# Altium PCB ADSTM32-PCB.PcbDoc
Units mm, origin at the board's own origin, x right, y up, seen from the top; angles counter-clockwise.
Board outline 45 x 31.75 mm, 2 copper layers (Top Layer, Bottom Layer), stack 1.671 mm thick; 30 components, 26 nets, 133 pads, 27 vias.
Unrouted connection lines stored in the file: 30.
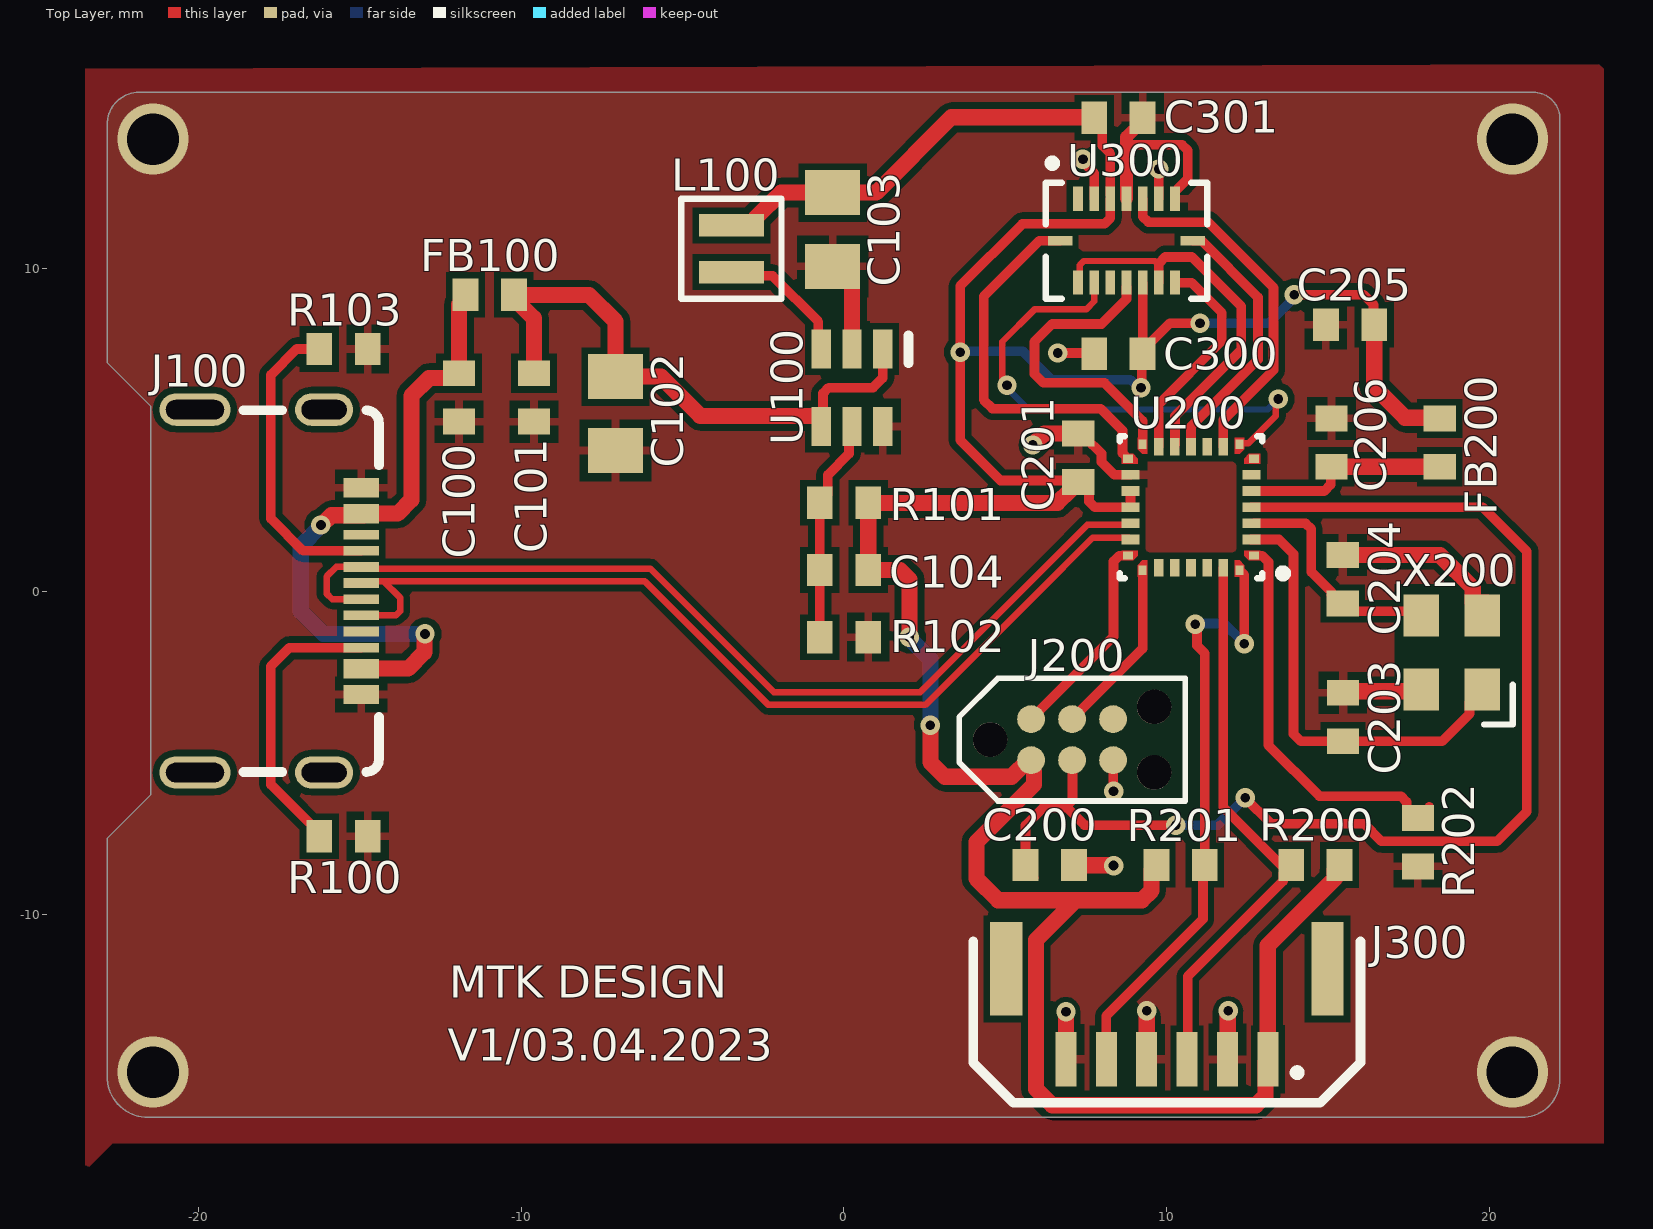
[diagram p0: Top Layer view]
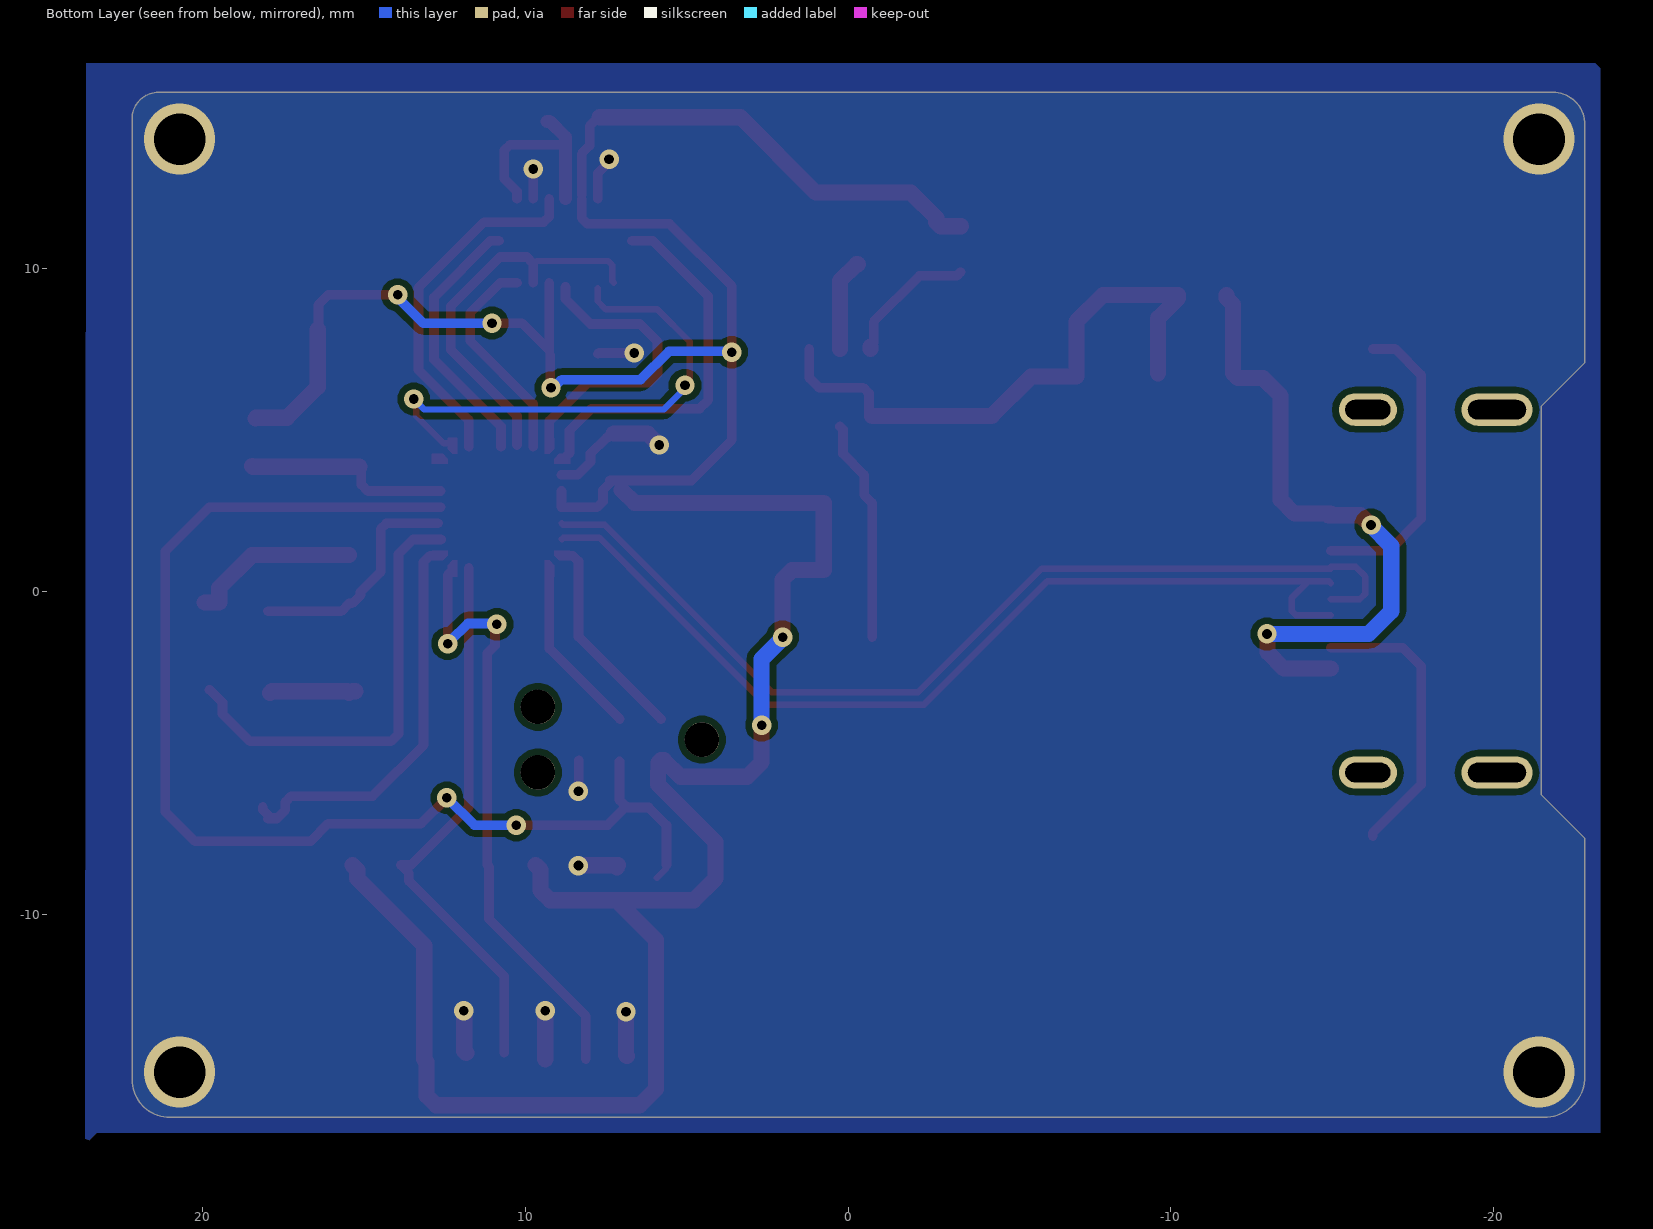
[diagram p1: Bottom Layer view, seen from below]
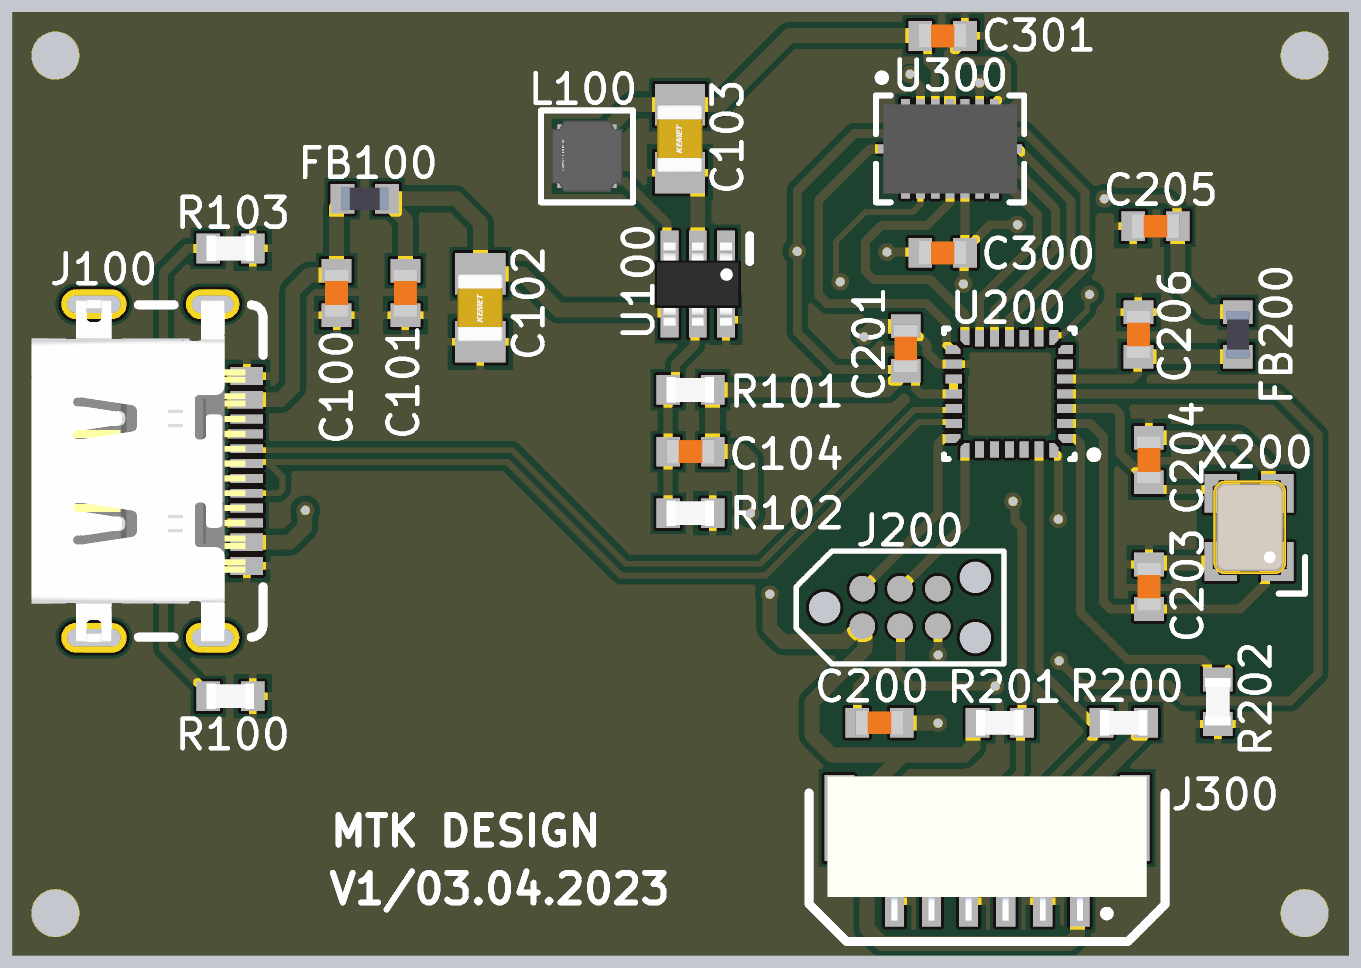
[diagram p2: 3D render of the assembled board from above, using the file's embedded part models]

## Layer stack, top to bottom
Top Solder: solder mask 0.0102, Solder Resist, Dk 3.5
Top Layer: signal copper 0.0356
Dielectric 1: dielectric 1.6, FR-4, Dk 4.6
Bottom Layer: signal copper 0.0356
Bottom Solder: solder mask 0.0102, Solder Resist, Dk 3.5

## Board outline
-21.555,-16.3 cw(c-21.555,-15.03) -22.825,-15.03 -22.825,-7.66 -21.475,-6.31 -21.475,5.73 -22.825,7.08 -22.825,14.45 cw(c-21.825,14.45) -21.825,15.45 19.525,15.45 19.5,15.45 21.35,15.45 cw(c21.35,14.625) 22.175,14.625 22.175,14.575 22.175,-15.105 22.175,-15.125 cw(c21,-15.125) 21,-16.3 19.075,-16.3 19.055,-16.3

## Design rules (kind name [scope] priority, off if disabled: settings)
Clearance [All] p1: gap=0.2 ignorepadtopadclearanceinfootprint=FALSE except(0: Arc-Hole Track-Hole SMDPad-Hole THPad-Hole Via-Hole Fill-Hole Poly-Hole Region-Hole Text-Hole; 0.15: Arc-Arc Arc-Track Arc-SMDPad Track-Track Track-SMDPad SMDPad-SMDPad; 0.3: Arc-THPad Track-THPad SMDPad-THPad THPad-THPad)
DiffPairsRouting [All] p1: maxlimit=0.3 minlimit=0.2 mostfreqgap=0.2 toplayer_minwidth=0.15 toplayer_maxwidth=1 toplayer_prefwidth=0.3 bottomlayer_minwidth=0.15 bottomlayer_maxwidth=1 bottomlayer_prefwidth=0.3 maxuncoupledlength=12.7
PolygonConnect [All] p1: thpad.connectstyle=Relief thpad.reliefconductorwidth=0.254 thpad.reliefentries=4 thpad.polygonreliefangle="90 Angle" thpad.airgapwidth=0.254 smdpad.connectstyle=Relief smdpad.reliefconductorwidth=0.254 smdpad.reliefentries=4 smdpad.polygonreliefangle="90 Angle" smdpad.airgapwidth=0.254 via.connectstyle=Direct via.reliefconductorwidth=0.254 via.reliefentries=4 via.polygonreliefangle="90 Angle" via.airgapwidth=0.254
RoutingVias [All] p1: holewidth=0.3 width=0.7 viastyle="Through Hole" minholewidth=0.25 minwidth=0.6 maxholewidth=0.3 maxwidth=0.7
SilkToSilkClearance [All] p1: silktosilkclearance=0.2
SolderMaskExpansion [All] p1: expansion=0.102 istentingtop=FALSE
UnRoutedNet [All] p1: checkbadconnections=TRUE
Width [All] p1: maxlimit=1 minlimit=0.15 preferedwidth=0.3
27 further rules are at their usual default settings.

## Classes and differential pairs
differential pair class USB: USB_D
differential pair USB_D: +USB_D_P -USB_D_N

## Components (designator, comment, footprint, x,y, rotation, side; value= is the part's Value field where it differs from the comment)
C100 "100n" CAP_0603 -11.925,6 r90 top
C101 "100n" CAP_0603 -9.603,6 r90 top
C102 "4u7" CAP_0805 -7.075,5.5 r90 top
C103 "4u7" CAP_0805 -0.35,11.201 r90 top
C104 "22p" CAP_0603 0,0.654 r0 top
C200 "100n" CAP_0603 6.372,-8.483 r180 top
C201 "100n" CAP_0603 7.256,4.13 r270 top
C203 "10p" CAP_0603 15.455,-3.9 r270 top
C204 "10p" CAP_0603 15.45,0.37 r270 top
C205 "100n" CAP_0603 15.675,8.249 r0 top
C206 "100n" CAP_0603 15.1,4.6 r270 top
C300 "100n" CAP_0603 8.5,7.35 r0 top
C301 "100n" CAP_0603 8.5,14.662 r180 top
FB100 "120R" FB_0603 -10.975,9.175 r0 top
FB200 "120R" FB_0603 18.45,4.6 r270 top
J100 "USB4510-03-1-A" USB4510-03-1-A -18.1,0 r270 top
J200 "TC2030-NL" TC2030-NL-FP 7.065,-4.6 r0 top
J300 "SM06B-GHS-TB" SM06B-GHS-TB 10,-13.1 r180 top
L100 "10u" FP-NRH2412-MFG -3.485,10.605 r90 top
R100 "5k1" RES_0603 -15.5,-7.592 r180 top
R101 "887k" RES_0603 0,2.734 r0 top
R102 "280k" RES_0603 0,-1.425 r180 top
R103 "5k1" RES_0603 -15.5,7.5 r180 top
R200 "5k1" RES_0603 14.6,-8.483 r0 top
R201 "5k1" RES_0603 10.425,-8.483 r180 top
R202 "5k1" RES_0603 17.775,-7.775 r90 top
U100 "LTC3405ES6#TRMPBF" SOT-23-6 0.25,6.3 r180 top
U200 "STM32F042G6U6" STM-UFQFPN28_V 10.748,2.6 r180 top
U300 "BMI088" BMI088 8.75,10.855 r0 top
X200 "24MHz" XTAL_3225 18.825,-1.9 r90 top

## Footprints (in the part's own frame and the unit in brackets; to place one, negate y for a bottom-side part, rotate by r counter-clockwise, add the part's x,y. Pads: shape width x height; smd on the part's side, far side on the other; paste and mask are expansions set on the pad)
BMI088 [mm]
  rect 0.3x0.75 smd: 1(-1.5,1.3) 2(-1,1.3) 3(-0.5,1.3) 4(0,1.3) 5(0.5,1.3) 6(1,1.3) 7(1.5,1.3) 9(1.5,-1.3) 10(1,-1.3) 11(0.5,-1.3) 12(0,-1.3) 13(-0.5,-1.3) 14(-1,-1.3) 15(-1.5,-1.3)
  rect 0.75x0.3 smd: 8(2.05,0) 16(-2.05,0)
  silkscreen extent -2.5,-1.8 2.5,2.51, body extent -2.25,-1.5 2.25,1.5, height 1.01
CAP_0603 [mm]
  rect 0.8x1 smd: 1(-0.75,0) 2(0.75,0)
  body extent -0.8,-0.4 0.8,0.4, height 0.51
CAP_0805 [mm]
  rect 1.4x1.7 smd: 1(-1.143,0) 2(1.143,0)
  body extent -1.15,-0.76 1.15,0.79, height 1.01
FB_0603 [mm]
  rect 0.8x1 smd: 1(-0.75,0) 2(0.75,0)
  body extent -0.8,-0.4 0.8,0.4, height 0.81
FP-NRH2412-MFG [mm]
  rect 0.7x2 smd paste+0 mask+0: 1(-0.725,0) 2(0.725,0)
  silkscreen extent -1.55,-1.55 1.55,1.55, body extent -1.35,-1.35 1.35,1.35, height 0.25
RES_0603 [mm]
  rect 0.8x1 smd: 1(-0.75,0) 2(0.75,0)
  body extent -0.8,-0.43 0.8,0.43, height 0.52
SM06B-GHS-TB [mm]
  rect 0.65x1.7 smd: 1(-3.125,1.4) 2(-1.875,1.4) 3(-0.625,1.4) 4(0.625,1.4) 5(1.875,1.4) 6(3.125,1.4)
  rect 1x2.9 smd: ""(-4.975,-1.4) ""(4.975,-1.4)
  silkscreen extent -6,-2.25 6,2.75, body extent -5.38,-2.8 5.38,2.05, height 4.26
SOT-23-6 [mm]
  rect 0.6x1.2 smd: 1(-0.95,-1.2) 2(0,-1.2) 3(0.95,-1.2) 4(0.95,1.2) 5(0,1.2) 6(-0.95,1.2)
  silkscreen extent -1.75,-1.63 -1.75,-0.76, body extent -1.45,-1.4 1.45,1.4, height 1.45
STM-UFQFPN28_V [mm] "QFN, 28-Leads, Body 4.1x4.1mm, Pitch 0.5mm"
  rect 0.3x0.25 smd: 1(-1.95,1.5) 7(-1.95,-1.5) 15(1.95,-1.5) 21(1.95,1.5)
  rect 0.55x0.3 smd: 2(-1.875,1) 3(-1.875,0.5) 4(-1.875,0) 5(-1.875,-0.5) 6(-1.875,-1) 16(1.875,-1) 17(1.875,-0.5) 18(1.875,0) 19(1.875,0.5) 20(1.875,1)
  rect 0.25x0.3 smd: 8(-1.5,-1.95) 14(1.5,-1.95) 22(1.5,1.95) 28(-1.5,1.95)
  rect 0.3x0.55 smd: 9(-1,-1.875) 10(-0.5,-1.875) 11(0,-1.875) 12(0.5,-1.875) 13(1,-1.875) 23(1,1.875) 24(0.5,1.875) 25(0,1.875) 26(-0.5,1.875) 27(-1,1.875)
  Top Layer region: -2.15,-1.35 -1.65,-1.35 -1.65,-1.505 -1.795,-1.65 -2.15,-1.65
  Top Layer region: -1.35,-2.15 -1.35,-1.65 -1.505,-1.65 -1.65,-1.795 -1.65,-2.15
  Top Layer region: -1.35,2.15 -1.35,1.65 -1.505,1.65 -1.65,1.795 -1.65,2.15
  Top Layer region: 1.35,-2.15 1.35,-1.65 1.505,-1.65 1.65,-1.795 1.65,-2.15
  Top Layer region: 2.15,1.35 1.65,1.35 1.65,1.505 1.795,1.65 2.15,1.65
  Top Layer region: -2.15,1.35 -1.65,1.35 -1.65,1.505 -1.795,1.65 -2.15,1.65
  Top Layer region: 2.15,-1.35 1.65,-1.35 1.65,-1.505 1.795,-1.65 2.15,-1.65
  Top Layer region: 1.35,2.15 1.35,1.65 1.505,1.65 1.65,1.795 1.65,2.15
  silkscreen extent -2.98,-2.2 2.2,2.2, body extent -2.05,-2.05 2.05,2.05, height 0.6
TC2030-NL-FP [mil]
  round 33.98 smd: 1(-50,-25) 2(-50,25) 3(0,-25) 4(0,25) 5(50,-25) 6(50,25)
  round 42.01 hole 42.01 unplated: MH(-100,0) MH(100,-40) MH(100,40)
  silkscreen extent -138,-75 138,75
USB4510-03-1-A [mm]
  rect 0.6x1.1 smd: A1B12(-3.2,3.15) A4B9(-2.4,3.15) B1A12(3.2,3.15) B4A9(2.4,3.15)
  rect 0.3x1.1 smd: A5(-1.25,3.15) A6(-0.25,3.15) A7(0.25,3.15) A8(1.25,3.15) B5(1.75,3.15) B6(0.75,3.15) B7(-0.75,3.15) B8(-1.75,3.15)
  oval 1x1.8 hole 0.6 slot 1.4 at 90 deg: SH(-5.62,2) SH(5.62,2)
  oval 1x2.2 hole 0.6 slot 1.8 at 90 deg: SH(-5.62,-2) SH(5.62,-2)
  silkscreen extent -5.6,-0.5 5.6,3.7, body extent -5.77,-4.1 5.77,3.1, height 1.57
XTAL_3225 [mm]
  rect 1.3x1.1 smd: 1(-1.15,-0.95) 2(1.15,-0.95) 3(1.15,0.95) 4(-1.15,0.95)
  silkscreen extent -2.23,-1.89 -1,-1, body extent -1.6,-1.28 1.6,1.22, height 0.61

## Part data
C100 C101 C104 C200 C201 C203 C204 C205 C206 C300 C301: library part CAP_0603_16V, "Capacitor SMD 0603 16V"
C102 C103: library part CAP_0805_16V, "Capacitor SMD 0805 16V"
FB100 FB200: library part FB_0603, "Ferrite Bead SMD 0603"
J100: "USB Connector Type C SMT Mid-Mount 16 Pin", Manufacturer=GCT, Manufacturer Part Number=USB4510-03-1-A
J200: "Tag-Connect No-Solder SWD Debug Connector (No Legs) DO NOT PLACE", Manufacturer=Tag-Connect, Manufacturer Part Number=TC2030-NL-FP
J300: "Header Connector 6 Position 1.25MM Pitch SMD Horizontal JST GH", Manufacturer=JST, Manufacturer Part Number=SM06B-GHS-TB
L100: library part CMP-14484-000582-1, "Shielded Wirewound Inductor 10uH 20% 0.51A 0.72Ω SMD", Case/Package=Nonstandard, Current Rating=450mA, DC Resistance (DCR)=600mR, Inductance=10uH, Max DC Current=810mA, Max Operating Temperature=120°C, Min Operating Temperature=-25°C, Package Quantity=2500, Self Resonant Frequency=29MHz, Test Frequency=100kHz, Tolerance=20%, Core Material=Ferrite, Halogen Free="Halogen Free", Height=1.2mm, Height - Seated (Max)=0.047inch, Length=0.095inch, Mount="Surface Mount", Packaging="Tape and Reel", RoHS Compliant=Yes, Saturation Current=810mA, Shielding=Shielded, Termination=SMD/SMT, Width=0.095inch
R100 R101 R102 R103 R200 R201 R202: library part RES_0603, "Resistor SMD 0603"
U100: "1.5MHz, 300mA / Synchronous Step-Down / Regulator in ThinSOT", Manufacturer="Analog Devices", Manufacturer Part Number=LTC3405ES6#TRMPBF
U200: library part CMP-0304-00112-2, "ARM Cortex-M0 32-bit MCU, 32 KB Flash, 6 KB Internal RAM, 24 I/Os, 28-Pin UFQFPN, -40 to 85 degC, Tray", I/Os (High Current)=24, Manufacturer=STMicroelectronics, Operating Frequency(F) (Processor speed) (MHz)=48, Package Description="28-Pin Ultra Thin Fine Pitch Quad Flat No-Lead, 4 x 4 x 0.6 mm Body, 0.5 mm Pitch", Package Reference=UFQFPN28, Supply Voltage(Vcc) min (V)=2, ComponentLink1Description="Manufacturer URL", ComponentLink1URL=http://www.st.com/, ComponentLink2Description=Datasheet, ComponentLink2URL=http://www.st.com/st-web-ui/static/active/en/resource/technical/document/datasheet/DM00105814.pdf, Core="ARM Cortex-M0", DatasheetVersion="Rev. 5", FLASH Size (Prog) (kB)=32, Internal RAM Size (kB)=6, Mounting Technology="Surface Mount", Packing=Tray, PartNumber=STM32F042G6U6
U300: "Inertial Measurement Unit IMU 6-Axis LGA", Manufacturer=Bosch, Manufacturer Part Number=BMI088
X200: library part TSX-3225_24.0000MF15X-AC, "Crystal SMD 24MHz 10PPM 7pF 3225", Load Capacitance=7pF, Manufacturer=Epson, Manufacturer Number="TSX-3225 24.0000MF15X-AC", ESR=40R, Type=XTAL

## Via types
v1: diameter 0.6, hole 0.3, Top Layer to Bottom Layer, tented both sides, 23 vias
v2: diameter 2.2, hole 1.6, Top Layer to Bottom Layer, tented both sides, 4 vias

## Nets (pads, with @x,y where several pads share a name; then routed paths per layer and width w, separated by ;. In a path a pad name is that pad's centre, name@x,y a point inside that pad or via, vN(x,y) a via of type N, cw(c..) or ccw(c..) an arc to the next point about the centre after c; other vN are vias at no path point)
+3V3: C103.2 C104.2 C201.2 C205.2 C300.2 C301.2 FB200.1 J200.1 J300.1 L100.2 R101.2 R200.2 R201.2 U200.17 U200.18 U300.3 U300.11 | length 107.5
  Top Layer w0.3: C201.2@7.339,3.38 7.589,3.13 7.589,2.776 7.764,2.6 U200.18 U200.17 U200.17@8.875,3.1 ; C201.2@7.375,3.425 4.85,3.425 3.6,4.675 v1(3.6,7.4) 3.6,9.45 5.525,11.375 8.074,11.375 8.25,11.551 U300.3 ; C301.2 8,14.412 8,13.8 8.25,13.55 U300.3@8.25,12.275 ; v1(9.2,6.3) 9.225,6.325 C300.2@9.225,7.325 ; U300.11 9.25,7.45 10.1,8.3 v1(11.025,8.3) ; v1(13.95,9.175) 16.1,9.175 16.401,8.874 16.401,8.124 C205.2@16.425,8.1
  Top Layer w0.5: L100.2@-3.5,11.3 -2.864,11.3 -2.735,11.43 -2.735,11.559 -1.95,12.344 C103.2 0.994,12.344 3.325,14.675 C301.2@7.7,14.675 ; v1(2.025,-1.425) 2.025,0.361 1.732,0.654 C104.2 R101.2 6.61,2.734 C201.2@7.006,3.13 ; v1(2.675,-4.15) 2.675,-5.3 3.125,-5.75 5.189,-5.75 5.704,-5.235 J200.1 5.864,-5.304 5.864,-5.561 5.882,-5.579 5.882,-5.993 4.1,-7.775 4.1,-8.9 4.775,-9.575 9.225,-9.575 9.525,-9.275 9.525,-8.633 R201.2 ; 7.125,-9.625 5.95,-10.8 5.95,-15.425 6.45,-15.925 12.757,-15.925 13.05,-15.632 13.05,-14.575 J300.1 13.125,-10.975 15.2,-8.9 15.2,-8.633 R200.2 ; C205.2@16.425,8.1 16.425,6.325 17.381,5.369 18.331,5.369 FB200.1@18.35,5.35
  Bottom Layer w0.3: v1(3.6,7.4) 3.625,7.425 5.55,7.425 6.425,6.55 8.869,6.55 9.119,6.3 v1(9.2,6.3) ; v1(11.025,8.3) 13.156,8.3 13.95,9.094 v1(13.95,9.175)
  Bottom Layer w0.5: v1(2.025,-1.425) 2.025,-1.452 2.675,-2.102 v1(2.675,-4.15)
+3V3A: C206.2 FB200.2 U200.5 | length 6.4
  Top Layer w0.3: U200.5 14.875,3.1 15.075,3.3 15.075,3.8 C206.2@15.125,3.85
  Top Layer w0.5: C206.2@15.125,3.85 18.425,3.85 FB200.2@18.45,3.875
+5V: C101.2 C102.2 FB100.2 U100.1 U100.4 | length 18.4
  Top Layer w0.3: U100.4@-0.75,5.425 -0.651,5.525 -0.651,6.124 -0.475,6.3 0.9,6.3 1.2,6.6 U100.1
  Top Layer w0.5: C101.2 -9.603,8.453 -10.225,9.075 FB100.2 -7.9,9.175 -7.075,8.35 C102.2 -5.668,6.643 -4.45,5.425 U100.4@-0.75,5.425
+VUSB: C100.2 FB100.1 J100.A4B9 J100.B4A9 | length 20.5
  Top Layer w0.5: v1(-16.2,2.05) -16.173,2.05 -15.873,2.35 -14.875,2.35 J100.A4B9@-14.825,2.4 ; J100.B4A9 -13.5,-2.4 -12.994,-1.894 -12.994,-1.344 v1(-12.975,-1.325) ; J100.A4B9 -13.825,2.4 -13.4,2.825 -13.4,6.05 -12.85,6.6 -12.075,6.6 C100.2 -11.925,8.875 -11.725,9.075 FB100.1
  Bottom Layer w0.5: v1(-16.2,2.05) -16.2,2.023 -16.825,1.398 -16.825,-0.625 -16.125,-1.325 v1@-13.002,-1.325
BOOT0: R202.2 U200.1 | length 12.6
  Top Layer w0.3: U200.1@12.675,1.1 U200.1 12.95,1.1 13.15,0.9 13.15,-4.775 14.726,-6.351 17.249,-6.351 17.425,-6.527 17.425,-6.775 17.675,-7.025 R202.2 ; R202.2@17.7,-7.05 R202.2@17.975,-7.05 ; R202.2@17.913,-6.988 18.125,-6.775 R202.2@18.125,-6.675
BUCK_SW: L100.1 U100.3 | length 4.2
  Top Layer w0.3: L100.1 -3.369,9.764 -2.214,9.764 -0.794,8.344 -0.794,7.694 U100.3@-0.7,7.6
  Top Layer w0.5: U100.3 U100.3@-0.7,7.575
BUCK_VFB: C104.1 R101.1 R102.2 U100.5 | length 6.9
  Top Layer w0.3: R102.2 C104.1 R101.1 -0.5,2.984 -0.5,3.6 0.157,4.257 0.157,5.007 U100.5
GND: C100.1 C101.1 C102.1 C103.1 C200.1 C201.1 C203.1 C204.1 C205.1 C206.1 C300.1 C301.1 J100.A1B12 J100.B1A12 J200.5 J300.2 J300.4 J300.6 R100.1 R102.1 R103.1 R202.1 U100.2 U100.6 U200.16 U300.2 U300.4 U300.6 U300.7 X200.2 X200.4 | length 30.4
  Top Layer w0.3: v1(6.625,7.375) 7.725,7.375 C300.1 ; v1(7.4,13.375) 7.4,13.294 7.75,12.944 U300.2 ; C201.1@7.425,4.75 7.486,4.75 7.975,4.261 7.975,4 8.375,3.6 U200.16 ; J200.5 8.343,-5.243 8.343,-6.193 v1(8.35,-6.2) ; 8.75,13.825 10.474,13.825 10.65,13.649 10.65,12.78 10.25,12.38 U300.7 ; U300.6 v1(9.75,13.075)
  Top Layer w0.4: U300.4 8.75,13.825 8.75,14.062 9.238,14.55 C301.1@9.325,14.55
  Top Layer w0.5: C103.1@-0.3,10.125 -0.267,10.125 0.25,9.608 U100.2 ; v1(5.85,4.525) 6.205,4.88 C201.1 ; J300.6@6.85,-14.4 6.875,-14.375 v1(6.875,-13.025) ; C200.1 7.13,-8.492 8.358,-8.492 v1@8.375,-8.475 ; C200.1@7.15,-8.55 C200.1@7.163,-8.562 ; J300.4 v1@9.375,-13.2 ; J300.2@11.825,-14.3 11.888,-14.237 11.888,-13.012 v1(11.9,-13) ; C203.1@15.25,-3.1 C203.1@15.35,-3.1 ; C204.1 18.455,1.12 19.475,0.1 19.475,-0.35 X200.2@19.925,-0.35 ; C203.1 15.505,-3.1 17.85,-3.1 X200.4@17.9,-3.15
  other v1: 9.375,-13 8.35,-8.5
  other v2: -21.4,-14.9 20.7,-14.9 -21.4,14 20.7,14
I2C_SCL: J300.3 R200.1 U200.27 | length 17.4
  Top Layer w0.3: J300.3@10.65,-14.3 10.65,-11.925 13.6,-8.975 13.6,-8.733 R200.1 13.533,-8.483 11.748,-6.698 U200.27
I2C_SDA: J300.5 R201.1 U200.28 | length 18.9
  Top Layer w0.3: J300.5 8.125,-13.15 11.118,-10.157 11.118,-8.541 R201.1 11.175,-1.925 10.932,-1.682 10.932,-1.082 v1(10.875,-1.025) ; U200.28 12.4,0.498 v1(12.4,-1.625)
  Bottom Layer w0.3: v1(10.875,-1.025) 10.9,-1 11.775,-1 v1@12.325,-1.55
IMU_CSB_ACCEL: U200.8 U300.14 | length 16.1
  Top Layer w0.2: v1@4.95,6.275 4.9,6.325 4.9,7.725 5.9,8.725 7.5,8.725 7.75,8.975 U300.14@7.75,9.375 ; U200.8 12.272,4.574 12.524,4.574 13.373,5.423 13.373,5.873 v1(13.45,5.95)
  Bottom Layer w0.2: v1@5.058,6.275 5.708,5.625 13.125,5.625 v1(13.45,5.95)
  other v1: 5.05,6.375
IMU_CSB_GYRO: U200.9 U300.5 | length 11.1
  Top Layer w0.3: U300.5 9.25,11.601 9.426,11.425 11.275,11.425 13.3,9.4 13.3,6.85 11.748,5.298 U200.9
IMU_INT1: U200.14 U300.12 | length 9.4
  Top Layer w0.3: U300.12@8.75,9.425 8.75,9.05 7.975,8.275 6.45,8.275 5.9,7.725 5.9,6.725 6.175,6.45 8.075,6.45 9.25,5.275 U200.14@9.25,4.625
IMU_INT2: U200.15 U300.16 | length 11.9
  Top Layer w0.3: U300.16 6.055,10.855 4.325,9.125 4.325,5.925 4.6,5.65 7.95,5.65 8.625,4.975 8.625,4.273 U200.15
IMU_MISO: U200.12 U300.10 U300.15 | length 12.1
  Top Layer w0.2: U300.15 7.3,9.605 7.3,10.1 7.425,10.225 9.625,10.225 9.742,10.108
  Top Layer w0.3: U300.10 9.75,10.15 9.95,10.35 10.775,10.35 12.3,8.825 12.3,7.475 10.25,5.425 U200.12@10.25,4.525
IMU_MOSI: U200.13 U300.9 | length 6.8
  Top Layer w0.3: U200.13@9.75,4.475 9.75,5.8 11.7,7.75 11.7,8.625 10.77,9.555 U300.9
IMU_SCK: U200.11 U300.8 | length 8.2
  Top Layer w0.3: U200.11 10.748,4.688 10.75,4.69 10.75,5.1 12.825,7.175 12.825,9.1 11.07,10.855 U300.8
NRST: C200.2 J200.3 U200.4 | length 37.7
  Top Layer w0.2: C200.2 5.622,-8.583 C200.2@5.922,-8.883
  Top Layer w0.3: C200.2 5.622,-7.253 6.175,-6.7 6.825,-6.7 ; 6.825,-6.675 6.875,-6.675 ; J200.3@7.075,-5.275 7.075,-6.475 6.875,-6.675 ; v1(10.275,-7.25) 7.45,-7.25 6.875,-6.675 ; v1(12.425,-6.4) 13.225,-7.2 16.1,-7.2 16.65,-7.75 20.225,-7.75 21.15,-6.825 21.15,1.225 19.775,2.6 U200.4
  Bottom Layer w0.3: v1(10.275,-7.25) 11.575,-7.25 v1(12.425,-6.4)
OSC_IN: C203.2 U200.2 X200.1 | length 13.9
  Top Layer w0.3: U200.2@12.6,1.6 U200.2 13.475,1.6 13.925,1.15 13.925,-4.4 ; 13.925,-4.425 14.15,-4.65 C203.2 18.525,-4.65 19.375,-3.8 19.375,-3.45 X200.1
OSC_OUT: C204.2 U200.3 X200.3 | length 7.2
  Top Layer w0.3: U200.3@12.7,2.1 13.986,2.1 ; 14.025,2.1 14.299,2.1 14.475,1.924 14.475,0.595 15.1,-0.03 15.1,-0.13 15.35,-0.38 C204.2 15.695,-0.625 X200.3@17.975,-0.625
SWCLK: J200.4 U200.22 | length 5.5
  Top Layer w0.3: J200.4 9.25,-1.78 U200.22@9.25,0.675
SWDIO: J200.2 U200.21 | length 6.5
  Top Layer w0.3: J200.2 8.35,-1.41 8.35,0.924 8.526,1.1 U200.21@8.825,1.1
USB_CC1: J100.A5 R103.2 | length 9.5
  Top Layer w0.3: R103.2 -16.95,7.5 -17.75,6.7 -17.75,2.25 -16.75,1.25 J100.A5
USB_CC2: J100.B5 R100.2 | length 8.9
  Top Layer w0.3: R100.2 -16.25,-7.492 -17.75,-5.992 -17.75,-2.325 -17.175,-1.75 J100.B5
USB_D_N: J100.A7 J100.B7 U200.19 | length 30.4
  Top Layer w0.2: J100.A7 -15.85,-0.25 -16.025,-0.075 -16.025,0.45 -15.725,0.75 J100.B7 ; J100.B7@-14.95,0.7 -6,0.7 -2.175,-3.125 2.359,-3.125 6.525,1.041 7.534,2.05 8.823,2.05 U200.19
USB_D_P: J100.A6 J100.B6 U200.20 | length 30
  Top Layer w0.2: J100.B6 -13.875,-0.75 -13.75,-0.625 -13.75,-0.2 -14.25,0.3 ; J100.A6 -14.9,0.3 -14.25,0.3 ; U200.20 8.823,1.65 7.7,1.65 6.925,0.875 6.691,0.641 2.525,-3.525 -2.341,-3.525 -6.166,0.3 -14.25,0.3
pads on no net: J100.A8 J100.B8 J100.SH J200.6 J200.MH J300. U200.6 U200.7 U200.10 U200.23 U200.24 U200.25 U200.26 U300.1 U300.13

## Polygon pours and split planes (outlines as drawn)
GND on Top Layer "GND_L01_P001" (solid, remove dead copper, pour order 1): -23.5,16.175 -23.5,-17.95 -22.65,-17.1 23.525,-17.1 23.525,16.175 23.375,16.325
GND on Bottom Layer "GND_L02_P002" (solid, remove dead copper, pour order 2): 23.625,-17.125 23.275,-16.775 -23.3,-16.775 -23.3,16.2 -23.15,16.35 23.6,16.35

## Other copper
Top Layer:
  pour cut-out: 20.825,-4.225 17.05,-4.225 17.05,0.225 20.825,0.225

## Silkscreen, mask and mechanical layers (free items; w line width, h text height)
Top Overlay:
  text "MTK DESIGN" at -12.225,-12.6 h1
  text "V1/03.04.2023" at -12.275,-14.55 h1
Mechanical 1:
  lines w0.2: 19.055,-16.3 -21.555,-16.3 cw(c-21.555,-15.03) -22.825,-15.03 -22.825,-7.66 -21.475,-6.31 -21.475,5.73 -22.825,7.08 -22.825,14.45 cw(c-21.825,14.45) -21.825,15.45 19.525,15.45 ; 19.075,-16.3 21,-16.3 ccw(c21,-15.125) 22.175,-15.125 ; 19.5,15.45 21.35,15.45 cw(c21.35,14.625) 22.175,14.625 ; 22.175,-15.105 22.175,14.575

## Text inside footprints (layer, text, board x,y; h text height)
J100: Mechanical 13 "PCB EDGE" at -21.475,1.016 h0.25 r270